# EAGLE board tx-qo100-topcase (EAGLE 9.6.2)
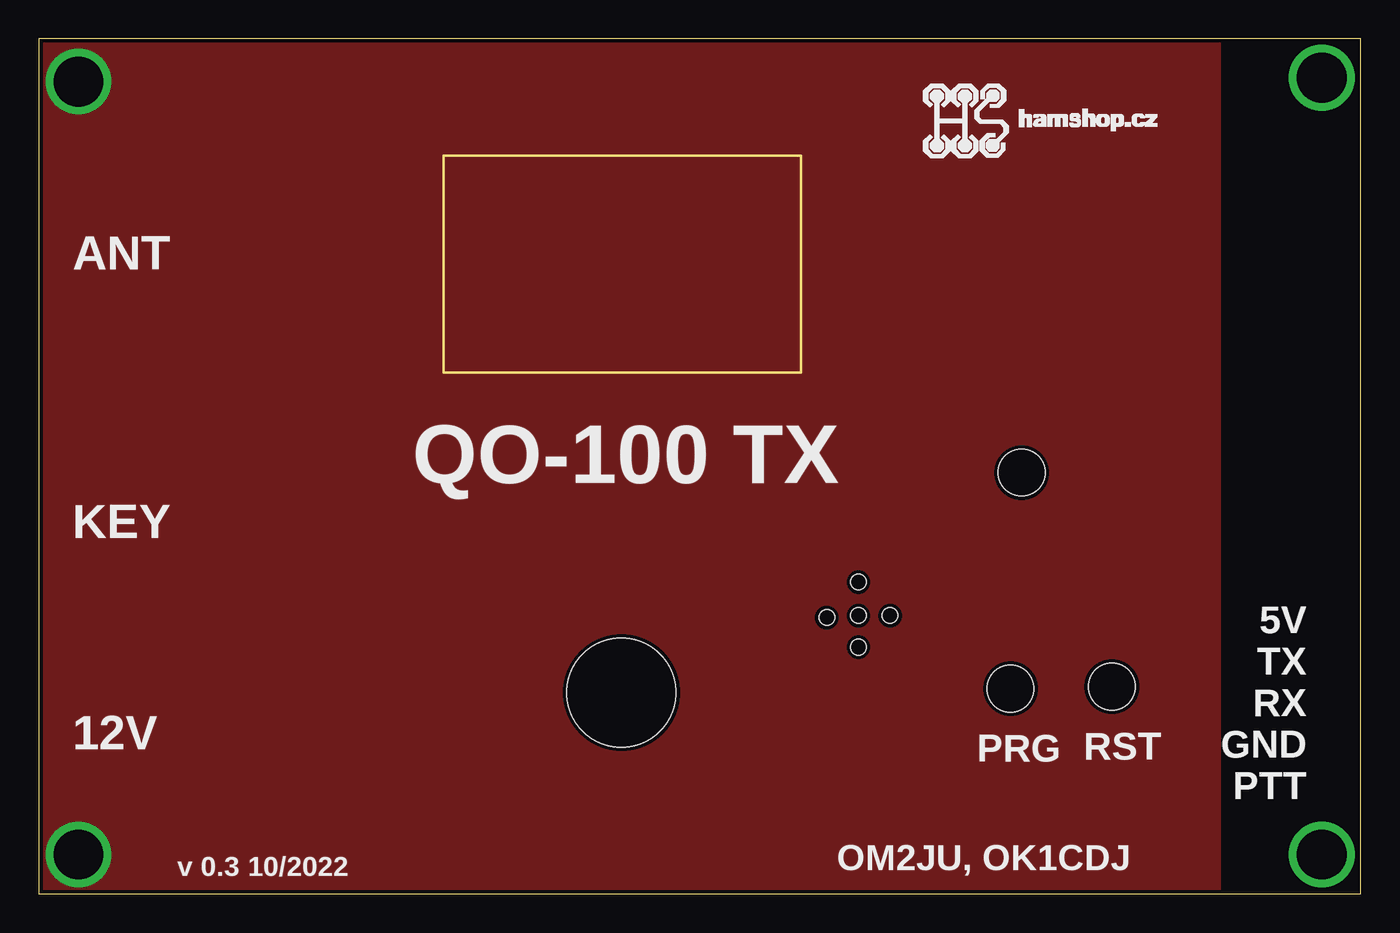
[diagram p0: board, top side]
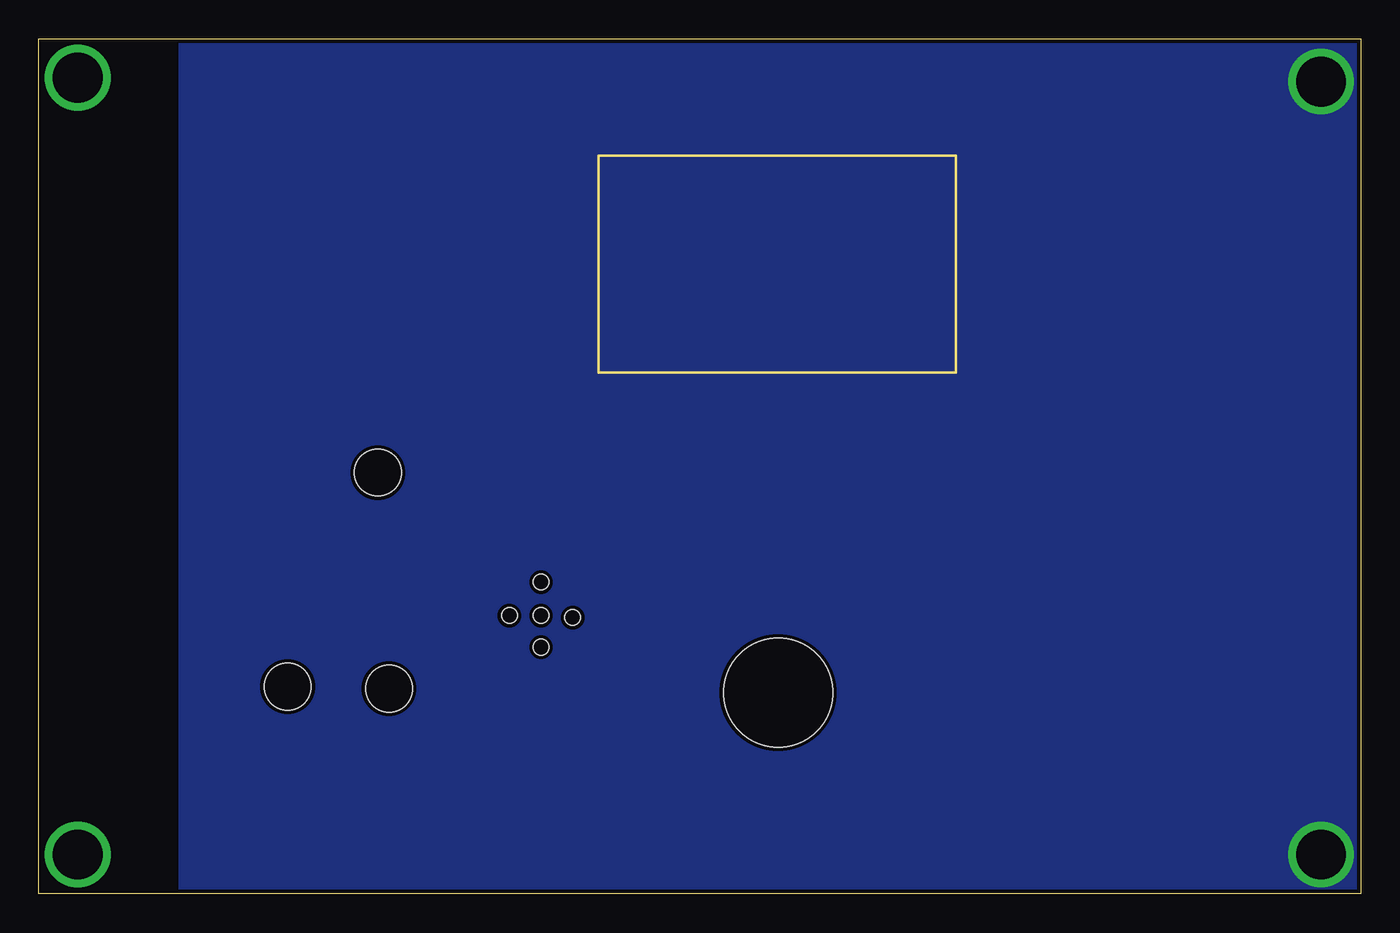
[diagram p1: board, bottom side, seen from below]

Size 85 x 55 mm. Coordinates in mm from the lower left corner, seen from the top.
Outline: 0,0 85,0 85,55 0,55 0,0
Copper layers (1*16): Top 0.035mm / dielectric 1.5mm / Bottom 0.035mm
Design rules "Fusion_eagle_rule_v1.1": minimum track width 6mil, minimum drill 12mil, track to track 6mil, track to pad 6mil, pad to pad 6mil, via to via 6mil, smd to smd 0mil, copper to edge 10mil, drill to drill 10mil, minimum pad ring 10mil, minimum via ring 6mil, stop-mask expansion 2mil, vias tented up to drill 100mil, thermal gap 10mil
Holes 7 mm at 37.47,12.95
Holes 1 mm at 52.7,17.91 52.7,20.07 52.7,15.88 50.67,17.78 54.74,17.91
Holes 3 mm at 62.48,13.21 69,13.34 63.2,27.1
Milling: 4 lines

## Placement (x,y rotation side)
U$1  [LOGO-16MM-SILK]  56.64,46.48 0 top

## Library data of the parts
U$1 = HS-logo

## Tracks (layer width: path | path; a pad name or v marks a point on that pad's centre or on a via)
GND  (via drill 3.2)
  other vias: 2.54,52.25 2.54,2.54
  pour Bottom: 0,55.88 75.95,55.88 75.95,0 0,0
  pour Top: 0.25,55.12 75.95,55.12 75.95,0 0.25,0
N$3  (via drill 3.2)
  other vias: 82.5,52.5
N$4  (via drill 3.2)
  other vias: 82.5,2.54

## Text on the board
tNames: ANT | QO-100 TX | KEY | 5V / TX / RX / GND / PTT | 12V | PRG | RST | OM2JU, OK1CDJ | v 0.3 10/2022